# Altium PCB 388D_Control_v1_PCB1.PcbDoc (part 3 of 7)
Units mil, origin at the board's own origin, x right, y up, seen from the top; angles counter-clockwise.
Board outline 3431 x 3800 mil, 6 copper layers (Top Layer, Singal Layer 2, Signal layer 3, Signal Layer 4, Signal Layer 5, Bottom Layer), stack 32.7 mil thick; 270 components, 383 nets, 1462 pads, 899 vias.
Unrouted connection lines stored in the file: 2.
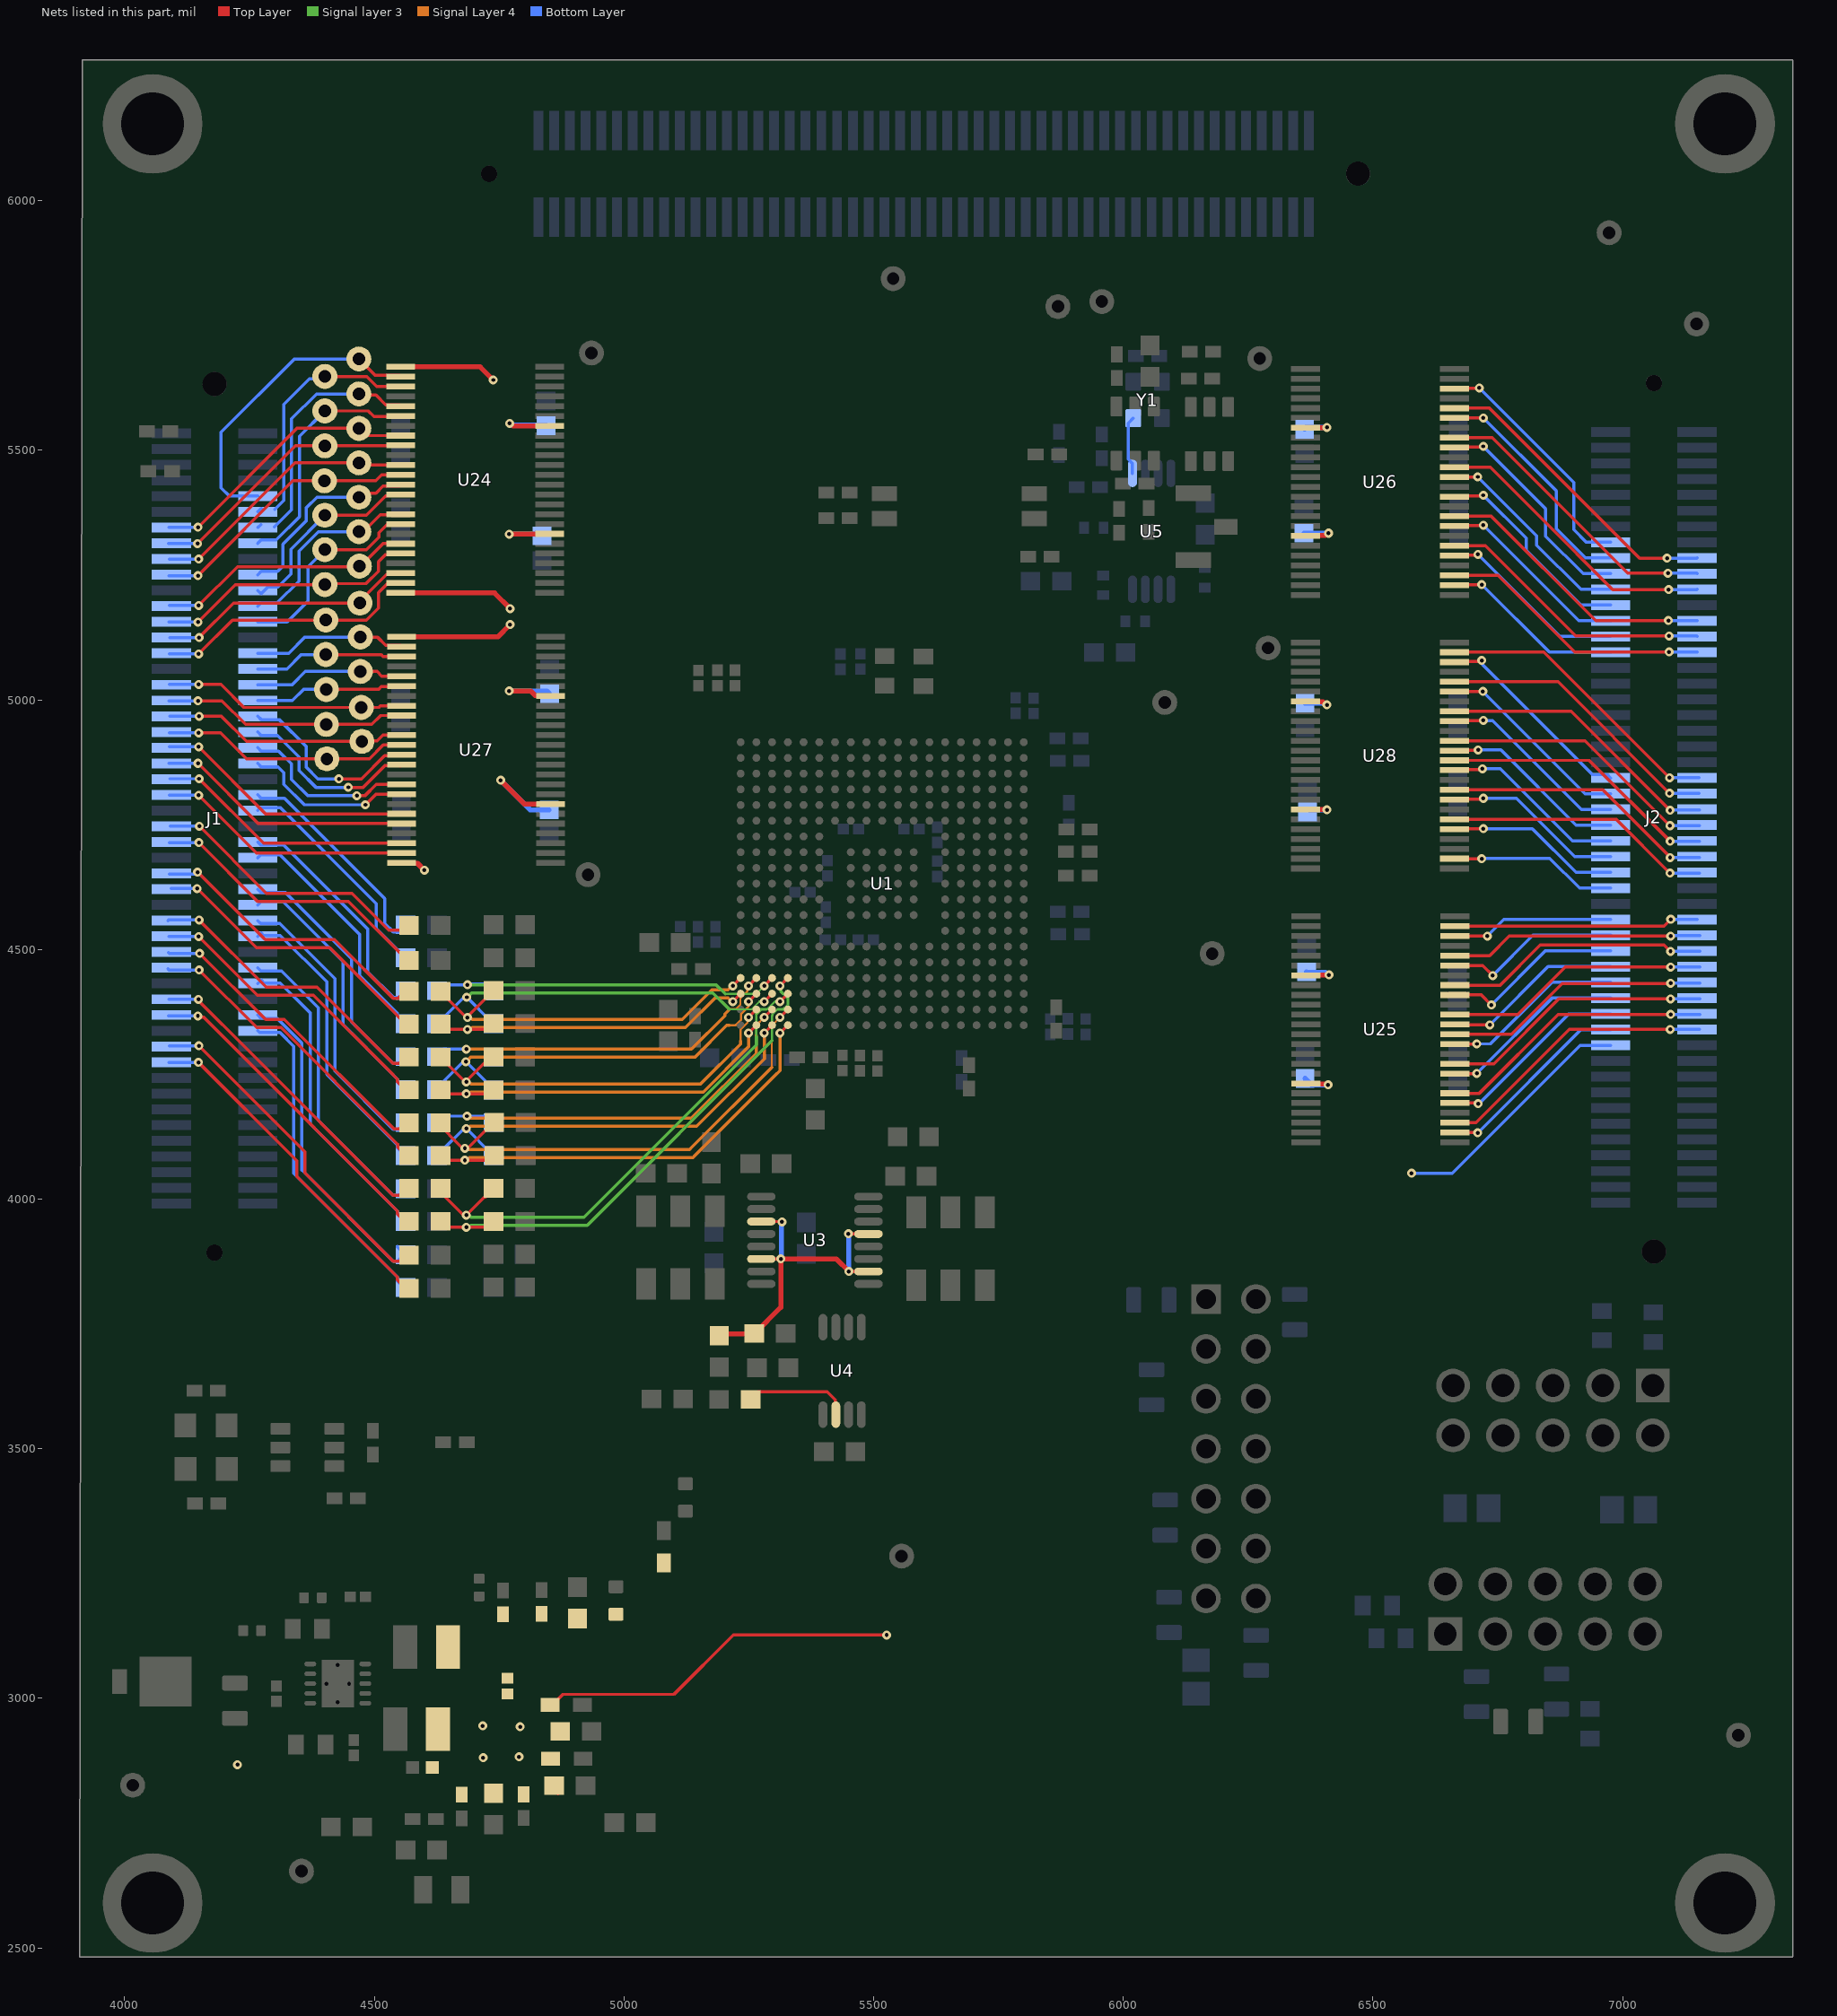
[diagram p6: the nets of this part, all layers, seen from the top]

## Part data (continued)
L3 L4 L5: library part CMP-006-00004-3, "Chip Ferrite Bead for General Use, 120 Ohm, 500 mA, -55 to 125 degC, 0603 (1608 Metric), RoHS, Tape and Reel", Case/Package=0603, Current Rating=500mA, Manufacturer=Murata, Max Operating Temperature=125°C, Min Operating Temperature=-55°C, Package Quantity=4000, Package Reference=BLM18_H950-2, Resistance=200mohm, Tolerance=25%, Core Material=Ferrite, Datasheet URL=https://statics3.seeedstudio.com/images/opl/datasheet/303010016.pdf, Datasheet Version=Jun-12, Impedance=120Ohm, Max Current Rating=500mA, Packaging=TapeandReel, RoHS Compliant=True
LED1: library part CMP-007-00038-1, "WL-SMCW SMT Mono-Color Chip LED Waterclear 0805", Manufacturer_Name="Wurth Elektronik", Manufacturer_Part_Number=150080VS75000, Mouser Part Number=710-150080VS75000, Datasheet Link=https://www.we-online.com/components/products/download/Download_3D_150080VS75000+%28rev1%29.pdf, Design Item ID=150080VS75000, Height=0.7mm, Mouser Price/Stock=https://www.mouser.co.uk/ProductDetail/Wurth-Elektronik/150080VS75000?qs=LlUlMxKIyB0tGHJmO6%252B0ug%3D%3D, Source=SamacSys.SchLib
R3 R4 R5 R6 R7 R8 R59: library part CMP-0026916-3, "RES, 39, 5%, 0.063 W, AEC-Q200 Grade 0, 0402", Manufacturer=Vishay-Dale, Power_W=63mW, Supplier Part Number 1=541-39JCT-ND, TempCo="200 ppm/C", Tolerance_%=5%, Value2=0.063W, Value_Code=39R0, ValueDisplayed=39, AEC Category=Q200, AEC Grade=0, AEC Qualified=Y, ComponentLink1Description="Datasheet link", ComponentLink1URL=http://www.vishay.com/docs/20035/dcrcwe3.pdf, CompType=Resistor, EIA_Code=E24, MountType=SMT, PackageReference=0402, PartNumber=CRCW040239R0JNED, Res_ohm=39, RoHS=E, SizeArea_mm2=0.5, SizeX_mm=1, SizeY_mm=0.5, SizeZ_mm=0.6, Supplier 1=Digi-Key, Supplier 2=Newark, Supplier 3=Mouser, Supplier Part Number 2=89M6649, Supplier Part Number 3=71-CRCW0402J-39-E3, Technology="Thick Film", Value1=5%, VDC_V=50V
R9 R10 R11 R12 R13 R14 R15 R16 R17 R18 R19 R20 R21 R22 R23 R24 R25 R26 R27 R28 R29 R30 R31 R32 R33 R34 R35 R36 R41 R42 R72 R73 R76 R85: library part CMP-0025697-4, "RES, 0, 5%, 0.1 W, AEC-Q200 Grade 0, 0603", Manufacturer=Vishay-Dale, Power_W=100mW, Supplier Part Number 1=541-0.0GCT-ND, TempCo="200 ppm/C", Tolerance_%=5%, Value2=0.1W, Value_Code=0000, ValueDisplayed=0, AEC Category=Q200, AEC Grade=0, AEC Qualified=Y, ComponentLink1Description="Datasheet link", ComponentLink1URL=http://www.vishay.com/docs/20035/dcrcwe3.pdf, CompType=Resistor, EIA_Code=E24, MountType=SMT, PackageReference=0603, PartNumber=CRCW06030000Z0EA, Res_ohm=0, RoHS=E, SizeArea_mm2=1.28, SizeX_mm=1.6, SizeY_mm=0.8, SizeZ_mm=1, Supplier 1=Digi-Key, Supplier 2=Newark, Supplier 3=Mouser, Supplier Part Number 2=52K8014, Supplier Part Number 3=71-CRCW0603-0-E3, Technology="Thick Film", Value1=5%, VDC_V=75V
R37 R38 R39 R40: library part CMP-0078660-1, "RES, 0.1, 1%, 0.25 W, 0402", Manufacturer=Panasonic, Power_W=250mW, Supplier Part Number 1=P17368CT-ND, TempCo="300 ppm/C", Tolerance_%=1%, Value2=0.25W, Value_Code=R100, ValueDisplayed=0.1, AEC Category=Q200, AEC Grade=N/A, AEC Qualified=N, ComponentLink1Description="Datasheet link", ComponentLink1URL=https://industrial.panasonic.com/cdbs/www-data/pdf/RDN0000/AOA0000C313.pdf, CompType=Resistor, EIA_Code=E96, MountType=SMT, PackageReference=0402, PartNumber=ERJ2BWFR100X, Res_ohm=1d, RoHS=Y, SizeArea_mm2=0.5, SizeX_mm=1, SizeY_mm=0.5, SizeZ_mm=0.6, Supplier 1=Digi-Key, Supplier 2=Mouser, Supplier Part Number 2=667-ERJ-2BWFR100X, Technology="Thick Film", Value1=1%
R43: library part CMP-0022895-5, "RES, 1.00 k, 1%, 0.1 W, 0603", Manufacturer=Yageo, Power_W=100mW, Supplier Part Number 1=311-1.00KHRCT-ND, TempCo="100 ppm/C", Tolerance_%=1%, Value2=0.1W, Value_Code=1k00, ValueDisplayed=1.00k, AEC Category=Q200, AEC Grade=N/A, AEC Qualified=N, ComponentLink1Description="Datasheet link", ComponentLink1URL=http://www.yageo.com/pdf/Pu-RC0603_51_PbFree_L_2.pdf, CompType=Resistor, EIA_Code=E96, MountType=SMT, PackageReference=0603, PartNumber=RC0603FR-071KL, Res_ohm=1k, RoHS=Y, SizeArea_mm2=1.28, SizeAreaWB_mm2=4.68, SizeX_mm=1.6, SizeY_mm=0.8, SizeZ_mm=1, Supplier 1=Digi-Key, Supplier 2=Mouser, Supplier 3=Farnell, Supplier Part Number 2=603-RC0603FR-071KL, Supplier Part Number 3=9238484, Technology="Thick Film", Value1=1%, VDC_V=75V
R44: library part CMP-009-00005-5, "Chip Resistor, 0 Ohm, 0.1 W, -55 to 155 degC, 0402 (1005 Metric)", Case/Package=0402, Max Operating Temperature=155°C, Min Operating Temperature=-55°C, Power=100mW, Tolerance=5%, Voltage Rating=50V, Mounting Technology=SM, Pins=2, RoHS Compliant=True
R45: library part CMP-009-00081-2, "22K 0.063W 1% 0402 (1005 Metric)  SMD", Case/Package=0402, Power=63mW, Tolerance=1%, Mounting Technology=SMT, Pins=2
R46 R163 R164 R165 R166 R167 R168 R169: library part CMP-009-00006-5, "Chip Resistor, 0 Ohm, 0.1 W, -55 to 155 degC, 0603 (1608 Metric)", Case/Package=0603, Max Operating Temperature=155°C, Min Operating Temperature=-55°C, Power=100mW, Tolerance=5%, Voltage Rating=50V, Mounting Technology=SM, Pins=2, RoHS Compliant=True
R47: library part CMP-0026962-3, "RES, 680, 5%, 0.063 W, AEC-Q200 Grade 0, 0402", Manufacturer=Vishay-Dale, Power_W=63mW, Supplier Part Number 1=541-680JCT-ND, TempCo="200 ppm/C", Tolerance_%=5%, Value2=0.063W, Value_Code=680R, ValueDisplayed=680/R0402, AEC Category=Q200, AEC Grade=0, AEC Qualified=Y, ComponentLink1Description="Datasheet link", ComponentLink1URL=http://www.vishay.com/docs/20035/dcrcwe3.pdf, CompType=Resistor, EIA_Code=E24, MountType=SMT, PackageReference=0402, PartNumber=CRCW0402680RJNED, Res_ohm=680, RoHS=E, SizeArea_mm2=0.5, SizeX_mm=1, SizeY_mm=0.5, SizeZ_mm=0.6, Supplier 1=Digi-Key, Supplier 2=Newark, Supplier 3=Mouser, Supplier Part Number 2=59M6744, Supplier Part Number 3=71-CRCW0402J-680-E3, Technology="Thick Film", Value1=5%, VDC_V=50V
R48: library part CMP-0026300-2, "RES, 340 k, 1%, 0.063 W, AEC-Q200 Grade 0, 0402", Manufacturer=Vishay-Dale, Power_W=63mW, Supplier Part Number 1=541-340KLCT-ND, TempCo="100 ppm/C", Tolerance_%=1%, Value2=0.063W, Value_Code=340k, ValueDisplayed=340k/R0402, AEC Category=Q200, AEC Grade=0, AEC Qualified=Y, ComponentLink1Description="Datasheet link", ComponentLink1URL=http://www.vishay.com/docs/20035/dcrcwe3.pdf, CompType=Resistor, EIA_Code=E96, MountType=SMT, PackageReference=0402, PartNumber=CRCW0402340KFKED, Res_ohm=340k, RoHS=E, SizeArea_mm2=0.5, SizeX_mm=1, SizeY_mm=0.5, SizeZ_mm=0.6, Supplier 1=Digi-Key, Supplier 2=Newark, Supplier 3=Mouser, Supplier Part Number 2=52K6992, Supplier Part Number 3=71-CRCW0402-340K-E3, Technology="Thick Film", Value1=1%, VDC_V=50V
R49: library part CMP-0026676-1, "RES, 2.00 k, 1%, 0.1 W, AEC-Q200 Grade 0, 0402", Manufacturer=Panasonic, Power_W=100mW, Supplier Part Number 1=P2.00KLCT-ND, TempCo="100 ppm/C", Tolerance_%=1%, Value2=0.1W, Value_Code=2k00, ValueDisplayed=2.00k/R0402, AEC Category=Q200, AEC Grade=0, AEC Qualified=Y, ComponentLink1Description="Datasheet link", ComponentLink1URL=http://industrial.panasonic.com/cdbs/www-data/pdf/RDA0000/AOA0000C86.pdf, CompType=Resistor, EIA_Code=E96, LatestRevisionDate=2017-03-09, MountType=SMT, PackageReference=0402, PartNumber=ERJ-2RKF2001X, Published=2008-06-26, Publisher="Texas Instruments", Res_ohm=2k, RoHS=Y, SizeArea_mm2=0.5, SizeX_mm=1, SizeY_mm=0.5, SizeZ_mm=0.6, Supplier 1=Digi-Key, Supplier 2=Newark, Supplier 3=Mouser, Supplier Part Number 2=73T6486, Supplier Part Number 3=667-ERJ-2RKF2001X, Technology="Thick Film", U/M=EA, Value1=1%, VDC_V=50V
R50: library part CMP-0026160-2, "RES, 205 k, 1%, 0.063 W, AEC-Q200 Grade 0, 0402", Manufacturer=Vishay-Dale, Power_W=63mW, Supplier Part Number 1=541-205KLCT-ND, TempCo="100 ppm/C", Tolerance_%=1%, Value2=0.063W, Value_Code=205k, ValueDisplayed=205k/R0402, AEC Category=Q200, AEC Grade=0, AEC Qualified=Y, ComponentLink1Description="Datasheet link", ComponentLink1URL=http://www.vishay.com/docs/20035/dcrcwe3.pdf, CompType=Resistor, EIA_Code=E96, MountType=SMT, PackageReference=0402, PartNumber=CRCW0402205KFKED, Res_ohm=205k, RoHS=E, SizeArea_mm2=0.5, SizeX_mm=1, SizeY_mm=0.5, SizeZ_mm=0.6, Supplier 1=Digi-Key, Supplier 2=Newark, Supplier 3=Mouser, Supplier Part Number 2=52K6827, Supplier Part Number 3=71-CRCW0402-205K-E3, Technology="Thick Film", Value1=1%, VDC_V=50V
R51: library part CMP-009-00066-2, "10K 0.063W 1% 0402 (1005 Metric)  SMD", Case/Package=0402, Power=63mW, Tolerance=1%, Mounting Technology=SMT, Pins=2
R52: library part CMP-009-00023-5, "Chip Resistor, 100 KOhm, +/- 1%, 0.1 W, -55 to 155 degC, 0603 (1608 Metric)", Case/Package=0603, Max Operating Temperature=155°C, Min Operating Temperature=-55°C, Power=100mW, Tolerance=1%, Voltage Rating=50V, Mounting Technology=SM, Pins=2, RoHS Compliant=True
R53: library part CMP-009-00163-3, "Chip Resistor, 200 kOhms, +/-1 %, 63 mW, -55 to 155 degC, 0402", Case/Package=0402, Max Operating Temperature=155°C, Min Operating Temperature=-55°C, Power=63mW, Tolerance=1%, Pins=2
R54: library part CMP-0025557-3, "RES, 75.0 k, 0.5%, 0.1 W, 0603", Manufacturer="Yageo America", Power_W=100mW, TempCo="50 ppm/C", Tolerance_%=0.5%, Value2=0.1W, Value_Code=75k0, ValueDisplayed=75.0k/R0603, AEC Category=Q200, AEC Qualified=?, ComponentLink1Description="Datasheet link", ComponentLink1URL=http://www.yageo.com/pdf/PYu-RT_1-to-0.05_RoHS_L_3.pdf, CompType=Resistor, EIA_Code=E192, LatestRevisionDate=2017-03-09, MountType=SMT, PackageReference=0603, PartNumber=RT0603DRE0775KL, Published=2008-06-26, Publisher="Texas Instruments", Res_ohm=75k, RoHS=Y, SizeArea_mm2=1.28, SizeX_mm=1.6, SizeY_mm=0.8, SizeZ_mm=1, Technology="Thin Film", U/M=EA, Value1=0.5%, VDC_V=75V
R55: library part CMP-0026950-3, "RES, 56, 5%, 0.063 W, AEC-Q200 Grade 0, 0402", Manufacturer=Vishay-Dale, Power_W=63mW, Supplier Part Number 1=541-56JCT-ND, TempCo="200 ppm/C", Tolerance_%=5%, Value2=0.063W, Value_Code=56R0, ValueDisplayed=56, AEC Category=Q200, AEC Grade=0, AEC Qualified=Y, ComponentLink1Description="Datasheet link", ComponentLink1URL=http://www.vishay.com/docs/20035/dcrcwe3.pdf, CompType=Resistor, EIA_Code=E24, MountType=SMT, PackageReference=0402, PartNumber=CRCW040256R0JNED, Res_ohm=56, RoHS=E, SizeArea_mm2=0.5, SizeX_mm=1, SizeY_mm=0.5, SizeZ_mm=0.6, Supplier 1=Digi-Key, Supplier 2=Newark, Supplier 3=Mouser, Supplier Part Number 2=89M6681, Supplier Part Number 3=71-CRCW0402J-56-E3, Technology="Thick Film", Value1=5%, VDC_V=50V
R62 R63 R68 R71 R79 R80: library part CMP-0026890-5, "RES, 2.2 k, 5%, 0.063 W, AEC-Q200 Grade 0, 0402", Manufacturer=Vishay-Dale, Power_W=63mW, Supplier Part Number 1=541-2.2KJCT-ND, TempCo="200 ppm/C", Tolerance_%=5%, Value2=0.063W, Value_Code=2k20, ValueDisplayed=2.2k, AEC Category=Q200, AEC Grade=0, AEC Qualified=Y, ComponentLink1Description="Datasheet link", ComponentLink1URL=http://www.vishay.com/docs/20035/dcrcwe3.pdf, CompType=Resistor, EIA_Code=E24, MountType=SMT, PackageReference=0402, PartNumber=CRCW04022K20JNED, Res_ohm=2.2k, RoHS=E, SizeArea_mm2=0.5, SizeX_mm=1, SizeY_mm=0.5, SizeZ_mm=0.6, Supplier 1=Digi-Key, Supplier 2=Newark, Supplier 3=Mouser, Supplier Part Number 2=59M6710, Supplier Part Number 3=71-CRCW0402J-2.2K-E3, Technology="Thick Film", Value1=5%, VDC_V=50V
R64: library part CMP-0078669-1, "RES, 10.0 k, 1%, 0.063 W, 0402", Manufacturer="Yageo America", Power_W=63mW, Supplier Part Number 1=311-10.0KLRCT-ND, TempCo="100 ppm/C", Tolerance_%=1%, Value2=0.063W, Value_Code=10k0, ValueDisplayed=10.0k, AEC Category=Q200, AEC Grade=N/A, AEC Qualified=N, ComponentLink1Description="Datasheet link", ComponentLink1URL=http://www.yageo.com/documents/recent/PYu-RC_Group_51_RoHS_L_8.pdf, CompType=Resistor, EIA_Code=E96, Green_EU RoHS="Passed with Exemption", Green_EU RoHS-2=Passed, Green_Lifecycle=Active, Green_REACh=Passed, MountType=SMT, PackageReference=0402, PartNumber=RC0402FR-0710KL, Res_ohm=10k, RoHS=Y, SizeArea_mm2=0.5, SizeX_mm=1, SizeY_mm=0.5, SizeZ_mm=0.6, Supplier 1=Digi-Key, Supplier 2=Newark, Supplier 3=Mouser, Supplier Part Number 2=98K7499, Supplier Part Number 3=603-RC0402FR-0710KL, Technology="Thick Film", Value1=1%
R66 R67: library part CMP-0026962-3, "RES, 680, 5%, 0.063 W, AEC-Q200 Grade 0, 0402", Manufacturer=Vishay-Dale, Power_W=63mW, Supplier Part Number 1=541-680JCT-ND, TempCo="200 ppm/C", Tolerance_%=5%, Value2=0.063W, Value_Code=680R, ValueDisplayed=680, AEC Category=Q200, AEC Grade=0, AEC Qualified=Y, ComponentLink1Description="Datasheet link", ComponentLink1URL=http://www.vishay.com/docs/20035/dcrcwe3.pdf, CompType=Resistor, EIA_Code=E24, MountType=SMT, PackageReference=0402, PartNumber=CRCW0402680RJNED, Res_ohm=680, RoHS=E, SizeArea_mm2=0.5, SizeX_mm=1, SizeY_mm=0.5, SizeZ_mm=0.6, Supplier 1=Digi-Key, Supplier 2=Newark, Supplier 3=Mouser, Supplier Part Number 2=59M6744, Supplier Part Number 3=71-CRCW0402J-680-E3, Technology="Thick Film", Value1=5%, VDC_V=50V
R69 R70: library part CMP-0026863-2, "RES, 1.5 M, 5%, 0.063 W, AEC-Q200 Grade 0, 0402", Manufacturer=Vishay-Dale, Power_W=63mW, Supplier Part Number 1=541-1.5MJCT-ND, TempCo="200 ppm/C", Tolerance_%=5%, Value2=0.063W, Value_Code=1M50, ValueDisplayed=1.5M, AEC Category=Q200, AEC Grade=0, AEC Qualified=Y, ComponentLink1Description="Datasheet link", ComponentLink1URL=http://www.vishay.com/docs/20035/dcrcwe3.pdf, CompType=Resistor, EIA_Code=E24, MountType=SMT, PackageReference=0402, PartNumber=CRCW04021M50JNED, Res_ohm=1.5M, RoHS=E, SizeArea_mm2=0.5, SizeX_mm=1, SizeY_mm=0.5, SizeZ_mm=0.6, Supplier 1=Digi-Key, Supplier 2=Mouser, Supplier Part Number 2=71-CRCW04021M50JNED, Technology="Thick Film", Value1=5%, VDC_V=50V
R74 R75: library part CMP-0026949-3, "RES, 56 k, 5%, 0.063 W, AEC-Q200 Grade 0, 0402", Manufacturer=Vishay-Dale, Power_W=63mW, Supplier Part Number 1=541-56KJCT-ND, TempCo="200 ppm/C", Tolerance_%=5%, Value2=0.063W, Value_Code=56k0, ValueDisplayed=56k, AEC Category=Q200, AEC Grade=0, AEC Qualified=Y, ComponentLink1Description="Datasheet link", ComponentLink1URL=http://www.vishay.com/docs/20035/dcrcwe3.pdf, CompType=Resistor, EIA_Code=E24, MountType=SMT, PackageReference=0402, PartNumber=CRCW040256K0JNED, Res_ohm=56k, RoHS=E, SizeArea_mm2=0.5, SizeX_mm=1, SizeY_mm=0.5, SizeZ_mm=0.6, Supplier 1=Digi-Key, Supplier 2=Newark, Supplier 3=Mouser, Supplier Part Number 2=89M6680, Supplier Part Number 3=71-CRCW0402J-56K-E3, Technology="Thick Film", Value1=5%, VDC_V=50V
R77 R78 R81 R83: library part CMP-0026765-1, "RES, 10.0, 0.1%, 0.063 W, 0402", Manufacturer="TE Connectivity", Power_W=63mW, Supplier Part Number 1=A102583CT-ND, TempCo="25 ppm/C", Tolerance_%=0.1%, Value2=0.063W, Value_Code=10R0, ValueDisplayed=10.0, AEC Category=Q200, AEC Grade=N/A, AEC Qualified=N, ComponentLink1Description="Datasheet link", ComponentLink1URL=http://www.te.com/commerce/DocumentDelivery/DDEController?Action=srchrtrv&DocNm=1773200&DocType=DS&DocLang=English, CompType=Resistor, EIA_Code=E192, LatestRevisionDate=2017-03-09, MountType=SMT, PackageReference=0402, PartNumber=CPF0402B10RE1, Published=2008-06-26, Publisher="Texas Instruments", Res_ohm=10, RoHS=Y, SizeArea_mm2=0.5, SizeX_mm=1, SizeY_mm=0.5, SizeZ_mm=0.35, Supplier 1=Digi-Key, Supplier 2=Newark, Supplier 3=Mouser, Supplier Part Number 2=80P3855, Supplier Part Number 3=279-CPF0402B10RE1, Technology="Thin Film", U/M=EA, Value1=0.1%
R82 R84 R86: library part CMP-0081856-1, "RES, 0, 0%, 0.2 W, AEC-Q200 Grade 0, 0402", Manufacturer=Vishay-Dale, Power_W=200mW, Supplier Part Number 1=541-0.0YBTR-ND, Tolerance_%=0%, Value2=0.2W, Value_Code=0, AEC Category=Q200, AEC Grade=0, AEC Qualified=Y, ComponentLink1Description="Datasheet link", ComponentLink1URL=http://www.vishay.com/docs/20043/crcwhpe3.pdf, CompType=Resistor, MountType=SMT, PackageReference=0402, PartNumber=CRCW04020000Z0EDHP, Res_ohm=0, RoHS=Y, SizeArea_mm2=0.5, SizeAreaWB_mm2=3, SizeX_mm=1, SizeY_mm=0.5, SizeZ_mm=0.6, Supplier 1=Digi-Key, Supplier 2=Newark, Supplier 3=Mouser, Supplier Part Number 2=96Y9050, Supplier Part Number 3=71-CRCW04020000Z0EDH, Technology="Thick Film", Value1=0%, ValueDisplayed=0, VDC_V=50V
R158: library part CMP-009-00174-4, "Chip Resistor, 4,7 Ohms, +/-5 %, 125 mW, -55 to 155 degC, 0805", Case/Package=0805, Max Operating Temperature=155°C, Min Operating Temperature=-55°C, Power=125mW, Tolerance=5%, Pins=2
R159 R162 R170 R171 R172 R173 R174: library part CMP-009-00174-4, "Chip Resistor, 4,7k Ohms, +/-5 %, 125 mW, -55 to 155 degC, 0805", Case/Package=0805, Max Operating Temperature=155°C, Min Operating Temperature=-55°C, Power=125mW, Tolerance=5%, Pins=2
R175: library part CMP-009-00174-4, "Chip Resistor, 4.7k Ohms, +/-5 %, 125 mW, -55 to 155 degC, 0805", Case/Package=0805, Max Operating Temperature=155°C, Min Operating Temperature=-55°C, Power=125mW, Tolerance=5%, Pins=2
R176 R177: library part CMP-0026938-5, "RES, 4.7 k, 5%, 0.063 W, AEC-Q200 Grade 0, 0402", Manufacturer=Vishay-Dale, Power_W=63mW, Supplier Part Number 1=541-4.7KJCT-ND, TempCo="200 ppm/C", Tolerance_%=5%, Value2=0.063W, Value_Code=4k70, ValueDisplayed=4.7k, AEC Category=Q200, AEC Grade=0, AEC Qualified=Y, ComponentLink1Description="Datasheet link", ComponentLink1URL=http://www.vishay.com/docs/20035/dcrcwe3.pdf, CompType=Resistor, EIA_Code=E24, MountType=SMT, PackageReference=0402, PartNumber=CRCW04024K70JNED, Res_ohm=4.7k, RoHS=E, SizeArea_mm2=0.5, SizeX_mm=1, SizeY_mm=0.5, SizeZ_mm=0.6, Supplier 1=Digi-Key, Supplier 2=Newark, Supplier 3=Mouser, Supplier Part Number 2=59M6733, Supplier Part Number 3=71-CRCW0402J-4.7K-E3, Technology="Thick Film", Value1=5%, VDC_V=50V
S1 S2: library part CMP-0002233-1, "Switch, Dual SPDT,  2 Pos, 0.1A, 6VDC, SMD", CurrentRating_mA=100A, Manufacturer="Copal Electronics", Supplier Part Number 1=CASD20JCT-ND, Circuit=SPDT, ComponentLink1Description="Datasheet Link", ComponentLink1URL=http://www.nidec-copal-electronics.com/e/catalog/switch/cas.pdf, CompType=Switch, LatestRevisionDate=2017-03-09, MountType=SMT, Orientation="Top Actuated", PackageReference=5.4x3.9mm, PartNumber=CAS-D20TA, PositionCount=2, Publisher="Texas Instruments", RoHS=Y, Supplier 1=Digi-Key, SwitchFunction=On-On, VDC_V=6V
S3: library part CMP-0002193-2, "Switch, SPST-NO, Off-Mom, 12 V, SMD", CurrentRating_mA=50A, Manufacturer="Omron Electronic Components", Supplier Part Number 1=SW1021CT-ND, Circuit=SPST-NO, ComponentLink1Description="Datasheet URL", ComponentLink1URL=http://www.omron.com/ecb/products/pdf/en-b3u.pdf, CompType=Switch, LatestRevisionDate=2017-03-09, MountType=SMT, Orientation="Top Actuated", PackageReference="SMD, 3-Leads, Body 3x2.5mm", PartNumber=B3U-1100P, PositionCount=1, Publisher="Texas Instruments", RoHS=Y, Supplier 1=Digi-Key, Supplier 2=Newark, Supplier 3=Mouser, Supplier Part Number 2=39M4619, Supplier Part Number 3=653-B3U-1100P, SwitchFunction=Off-Mom, VDC_V=12V
S4: library part CMP-0002230-1, "Switch, SPST, 2 Pos, 25mA, 24VDC, SMD", CurrentRating_mA=25A, Manufacturer="CTS Electrocomponents", Supplier Part Number 1=CT2182LPST-ND, Circuit=SPST, ComponentLink1Description="Datasheet Link", ComponentLink1URL=http://www.ctscorp.com/components/Datasheets/218.pdf, CompType=Switch, LatestRevisionDate=2017-03-09, MountType=SMT, Orientation="Top Actuated", PackageReference=3.71x5.8mm, PartNumber=218-2LPST, PositionCount=2, Publisher="Texas Instruments", RoHS=Y, Supplier 1=Digi-Key, Supplier 2=Mouser, Supplier Part Number 2=774-2182LPST, SwitchFunction=Off-On, VDC_V=24V
TP1 TP2 TP3 TP4 TP5 TP6 TP7 TP8 TP9 TP10 TP15 TP16 TP17 TP18 TP19 TP20 TP21 TP22 TP23 TP24 TP25 TP26 TP27 TP28 TP29 TP30 TP31 TP32 TP33 TP34 TP35 TP36 TP37 TP38 TP39 TP40 TP41 TP42 TP43: library part CMP-0078143-3, "TEST POINT.  No entry in BOM.", Manufacturer=N/A, CompType=Testpoint, PackageReference=N/A, PartNumber=N/A
U1: library part CMP-012-000147-1, "TMS320F28388DZWTS, ZWT0337A (NFBGA-337)", Alternate Manufacturer="Texas Instruments", AEC Category=Q200, AEC Qualified=N, Available Preview Images=2D, ComponentLink1Description="Datasheet Link", ComponentLink1URL=http://www.ti.com/lit/ds/symlink/tms320f28388d.pdf, ComponentLink2Description="Product Folder", ComponentLink2URL=http://www.ti.com/product/tms320f28388d, ComponentLink3Description="Online Datasheet", ComponentLink3URL=http://www.ti.com/product/tms320f28388d/datasheet, CompType=IC, Design Item ID=TMS320F28388DZWTS, Manufacturer="Texas Instruments", MountType=SMT, PackageDescription=NFBGA-337, PackageReference=ZWT0337A, PartNumber=TMS320F28388DZWTS, SizeArea_mm2=256, SizeAreaWB_mm2=324, SizeX_mm=16, SizeY_mm=16, SizeZ_mm=1.4, Source=SamacSys.SchLib
U2: library part CMP-0051789-2, "Dual Buffer/Driver with Open-Drain Output, DBV0006A, LARGE T&R", F @ Nom Voltage(Max)(Mhz)=150, Generic Part Number=SN74LVC2G07, ICC @ Nom Voltage(Max)(mA)=0.01, Manufacturer="Texas Instruments", Operating Temperature Range(C)="-40 to 125", Rating=Catalog, tpd @ Nom Voltage(Max)(ns)=8.6,4.4,3.7,2.9, Voltage(Nom)(V)=1.8,2.5,3.3,5, 3-State Output=No, AEC Category=Q200, AEC Qualified=N, Bits(#)=2, ComponentLink1Description="Datasheet Link", ComponentLink1URL=http://www.ti.com/lit/ds/symlink/sn74lvc2g07.pdf, ComponentLink2Description="Product Folder", ComponentLink2URL=http://www.ti.com/product/sn74lvc2g07, ComponentLink3Description="Online Datasheet", ComponentLink3URL=http://www.ti.com/product/sn74lvc2g07/datasheet, CompType=IC, DatasheetVersion=SCES308K, Green_EU RoHS=Passed, Green_EU RoHS-2=Passed, Green_Lifecycle=Active, Green_REACh=Passed, Input Type=CMOS/TTL, Logic=True, MountType=SMT, Output Drive (IOL/IOH)(Max)(mA)=32/-32, Output Type=CMOS, PackageDescription=SOT-23-6, PackageReference=DBV0006A, PartNumber=SN74LVC2G07DBVR, RoHS=Y, Schmitt Trigger=No, SizeArea_mm2=8.12, SizeAreaWB_mm2=14.82, SizeX_mm=2.8, SizeY_mm=2.9, SizeZ_mm=1.45, Sub-Family="Inverting Buffer/Driver", Technology Family=LVC, VCC(Max)(V)=5.5, VCC(Min)(V)=1.65
U3: library part CMP-014-00004-2, "High-Speed, Single-Supply, Rail-to-Rail Operational Amplifier MicroAmplifier(TM) Series, 2.7 to 5.5 V, -55 to 150 degC, 16-pin SOP (DBQ16), Green (RoHS & no Sb/Br)", Case/Package="16-Pin, Plastic Small Outline, Body 3.9 x 4.9 mm, Pitch 0.635 mm", Manufacturer="Texas Instruments", Total Supply Voltage(Max)(+5V is 5, +/-5V is 10)=5.5, Total Supply Voltage(Min)(+5V is 5, +/-5V is 10)=2.7, Available Preview Images=2D, CMRR(Min)(dB)=66, Code_JEDEC=MO-137, ComponentLink1Description="Manufacturer URL", ComponentLink1URL=http://www.ti.com/, ComponentLink2Description=Datasheet, ComponentLink2URL=http://www.ti.com/general/docs/lit/getliterature.tsp?genericPartNumber=OPA4350&fileType=pdf, ComponentLink3Description="Package Specification", ComponentLink3URL=http://www.ti.com/litv/pdf/msoi004g, DatasheetVersion=SBOS099C, Design Item ID=CMP-0041147-1, Eco-Plan="Green (RoHS & no Sb/Br)", IIB(Max)(pA)=10, Iq per channel(Max)(mA)=7.5, Mounting Technology="Surface Mount", Number of Channels=4, Offset Drift(Typ)(uV/C)=4, PackageReference=DBQ0016A, PackageVersion="4073301-2/H, 10/2008", Slew Rate(Typ)(V/us)=22, Source=SamacSys.SchLib, Sub Family="Low Input Bias Current Amp (<=10pA), Low Offset Voltage Amplifier (<=500uV), Low Supply Voltage Amplifier (<=2.7V), Precision Amplifier", Vio (25C)(Max)(mV)=0.5, Vn at 1kHz(Typ)(nV/rtHz)=18
U4: library part CMP-0032596-2, "Low Noise, Very Low Drift, Precision Series Voltage Reference, DGK0008A (VSSOP-8)", Manufacturer="Texas Instruments", Rating=Catalog, Temp Coeff(Max)(ppm/ degree C)=3, AEC Category=Q200, AEC Qualified=N, Code_JEDEC=MO-187-AA, ComponentLink1Description="Datasheet Link", ComponentLink1URL=http://www.ti.com/lit/ds/symlink/ref5030.pdf, ComponentLink2Description="Product Folder", ComponentLink2URL=http://www.ti.com/product/ref5030, ComponentLink3Description="Online Datasheet", ComponentLink3URL=http://www.ti.com/product/ref5030/datasheet, CompType=IC, DatasheetVersion=SBOS410E, Eco-Plan="Green (RoHS & no Sb/Br)", Initial Accuracy @ 25/deg C(%)=0.05, Iout/Iz(Max)(mA)=10, Iq(Max)(uA)=1000, MountType=SMT, PackageDescription=VSSOP-8, PackageReference=DGK0008A, PackageVersion=4073329/E, PartNumber=REF5030IDGKT, RoHS=Y, SizeArea_mm2=14.7, SizeAreaWB_mm2=23.6, SizeX_mm=4.9, SizeY_mm=3, SizeZ_mm=1.1, SubFamily="Series Voltage Reference", VI(Max)(V)=18, VI(Min)(V)=3.2, VO(V)=3
U5: library part CMP-052-000006-1, "Low Jitter, 1:4 LVCMOS Fan-out Clock Buffer, PW0008A (TSSOP-8)", Alternate Manufacturer="Texas Instruments", Available Preview Images=2D, ComponentLink1Description="Datasheet Link", ComponentLink1URL=http://www.ti.com/lit/ds/symlink/cdclvc1104.pdf, CompType=IC, Design Item ID=CDCLVC1104PW, Green_EU RoHS=Passed, Green_EU RoHS-2=Passed, Green_Lifecycle=Active, Green_REACh=Passed, LatestRevisionDate=2017-06-09, Manufacturer="Texas Instruments", MountType=SMT, PackageDescription=TSSOP-8, PackageReference=PW0008A, PartNumber=CDCLVC1104PW, Publisher="Texas Instruments", RoHS=Y, SizeArea_mm2=19.2, SizeAreaWB_mm2=42.0, SizeX_mm=6.4, SizeY_mm=3.0, SizeZ_mm=1.2, Source=MCU063B.SCHLIB, U/M=EA
U6 U7: library part CMP-052-000005-1, "High-Accuracy, Fixed-Threshold OV/UV Monitor, DDC0006A (SOT-23-T-6)", Alternate Manufacturer="Texas Instruments", Alternate PartNumber=TPS3702CX33DDCR, AEC Category=Q200, AEC Qualified=N, Available Preview Images=2D, ComponentLink1Description="Datasheet Link", ComponentLink1URL=http://www.ti.com/lit/ds/symlink/tps3702.pdf, ComponentLink2Description="Product Folder", ComponentLink2URL=http://www.ti.com/product/tps3702, ComponentLink3Description="Online Datasheet", ComponentLink3URL=http://www.ti.com/product/tps3702/datasheet, CompType=IC, Design Item ID=TPS3702CX33DDCT, Manufacturer="Texas Instruments", MountType=SMT, PackageDescription=SOT-23-T-6, PackageReference=DDC0006A, RoHS=Y, SizeArea_mm2=4.8675, SizeAreaWB_mm2=10.4675, SizeX_mm=1.65, SizeY_mm=2.95, SizeZ_mm=0.87, Source=MCU063B.SCHLIB
  U6: PartNumber=TPS3702CX33DDCT
  U7: PartNumber=TPS3702CX12DDCT
U8: library part CMP-014-000012-1, "Dual, Adjustable, 600mA and 1000mA, 2.25MHz Step-Down Converter with 1-Wire Interface in QFN 10-VSON -40 to 85", Alternate_PartNumber=TPS62420DRCT, Manufacturer="Texas Instruments", CompType=IC, Copyright="Copyright (C) 2025 Ultra Librarian. All rights reserved.", Design Item ID=TPS62420DRCR, Manufacturer_Name="Texas Instruments", Manufacturer_Part_Number=TPS62420DRCR, MountType=SMT, PackageReference=DRC0010J, PartNumber=TPS62420DRCR, RefDes=RefDes, RoHS=Y, Source=SamacSys.SchLib, Type=TYPE
U24 U25 U26 U27 U28: library part CMP-031-00095-1, "16-Bit Dual-Supply Bus Transceiver", Manufacturer_Name="Texas Instruments", Mouser Part Number=595-SN74LVCH16T245GR, Arrow Part Number=SN74LVCH16T245DGGR, Arrow Price/Stock=https://www.arrow.com/en/products/sn74lvch16t245dggr/texas-instruments, Datasheet Link=http://www.ti.com/lit/gpn/sn74lvch16t245, Design Item ID=SN74LVCH16T245DGGR, Height=1.2mm, Manufacturer_Part_Number=SN74LVCH16T245DGGR, Mouser Price/Stock=https://www.mouser.co.uk/ProductDetail/Texas-Instruments/SN74LVCH16T245DGGR?qs=dT9u2OTAaVU%2FCf3PTalIAw%3D%3D, Source=388D_Control_v1.SchLib
Y1: library part CMP-052-000000-1, "Oscillator, 25 MHz, 15 pF, SMD", Frequency Stability="10 ppm", Frequency_Fixed=25MHz, Load Capacitance=15pF, Manufacturer="ECS Inc.", PartNumber=ECS-2520S33-250-FN-TR, AEC Category=Q200, AEC Grade=N/A, AEC Qualified=N, Available Preview Images=2D, ComponentLink1Description="Datasheet Link", ComponentLink1URL=https://www.ecsxtal.com/store/pdf/ECS-2520S.pdf, CompType=Oscillator, Design Item ID=CMP-0082061-2, MountType=SMT, PackageReference=2x2.5mm, RoHS=Y, SizeArea_mm2=5, SizeAreaWB_mm2=10.5, SizeX_mm=2, SizeY_mm=2.5, SizeZ_mm=1, Source=MCU063B.SCHLIB, TaMax_C=85°C, TaMin_C=-40°C

## Free pads (board coordinates)
  round 200 hole 126 unplated: 2(4056,2590) 2(4056,6154) 2(7205,2590) 2(7205,6154)

## Via types
v1: diameter 18, hole 8, Top Layer to Bottom Layer, tented both sides, 898 vias
v2: diameter 18/18/18/18/18/18 (per signal layer), hole 8, Top Layer to Bottom Layer, tented both sides, 1 vias

## Nets (pads, with @x,y where several pads share a name; then routed paths per layer and width w, separated by ;. In a path a pad name is that pad's centre, name@x,y a point inside that pad or via, vN(x,y) a via of type N, cw(c..) or ccw(c..) an arc to the next point about the centre after c; other vN are vias at no path point)
1V2: C36.1 C37.1 C71.2 D2.2 L2.2 L5.1 R50.2
3V3: C35.1 C42.1 C53.1 C170.1 C171.1 C172.1 C173.1 C178.1 C179.1 C180.1 C181.1 C184.1 C185.1 D2.1 J2.21 L1.2 L3.1 L4.1 R44.2 R47.2 R48.2 U24.1 U24.24 U24.31 U24.42 U25.31 U25.42 U26.31 U26.42 U27.1 U27.24 U27.31 U27.42 U28.31 U28.42 | length 3235.1
  Top Layer w6.25: C53.1@4851,2825.5 4851.98,2825.5 4867.56,2809.92 C53.1@4867.56,2808.94 ; L3.1@4852.02,2987 4856.94,2987 4877.94,3008 5100,3008 5219,3127 v1(5526,3127)
  Top Layer w10: U24.24@4552.72,5214.59 4553.02,5214.3 4740.7,5214.3 v1(4771.9,5183.1) v1@4772,5183 ; U24.1@4552.9,5667.17 4711.83,5667.17 v1(4738,5641) ; U27.24@4554.71,4673.54 4555.62,4672.64 4586.47,4672.64 v1(4600.01,4659.1) ; U27.1@4554.71,5126.3 4747.3,5126.3 v1(4772,5151) ; v1(4753,4839) 4800.34,4791.66 U27.31@4852.98,4791.65 ; v1(4770,5018) 4813,5018 4821.9,5009.1 4852.08,5009.1 U27.42@4852.98,5008.19 ; v1(4770,5332) 4770.35,5332.35 4850.24,5332.35 U24.31@4850.59,5332.7 ; v1(4771,5554) 4773.16,5554 4777.93,5549.24 4848.91,5549.24 U24.42@4848.98,5549.17 ; U28.31@6364.42,4996.74 6365.02,4996.15 6399.69,4996.15 6405.84,4990 v1(6408,4990) ; U28.42@6364.87,4780.52 6365.13,4780.26 6407.74,4780.26 v1(6408,4780) ; U26.31@6364.87,5545.05 6365.24,5545.42 6407.64,5545.42 v1(6408.01,5545.78) ; U26.42@6365.46,5328.52 6366.37,5329.42 6404.16,5329.42 6408.84,5334.1 v1(6411.01,5334.1) ; U25.42@6365.74,4231.82 6366.65,4230.92 6405.92,4230.92 6407.84,4229 v1(6410,4229) ; U25.31@6366.11,4448.73 6411.64,4448.73 v1(6412.01,4449.1)
  Bottom Layer w6.25: v1(6577,4052) 6659,4052 6915.21,4308.21 J2.21@6976.01,4308.21
  Bottom Layer w10: v1(4753,4839) 4812.39,4779.61 C173.1@4850,4779.61 ; v1(4770,5018) 4845.5,5018 C172.1@4851.01,5012.5 ; v1(4770,5332) C170.1@4842.72,5332 ; v1(4771,5554) 4773.16,5554 4776.16,5551 4842.5,5551 C171.1@4844.01,5549.5 ; C179.1@6362.01,5334.18 6362.08,5334.1 v1(6411.01,5334.1) ; C178.1@6363.01,5542.39 6366.4,5545.78 v1(6408.01,5545.78) ; C185.1@6364.01,4241.78 6376.79,4229 v1(6410,4229) ; C180.1@6364.01,4993.39 6402.45,4993.39 6405.84,4990 v1(6408,4990) ; C184.1@6367.01,4455.18 6368.08,4454.1 6404.84,4454.1 6409.84,4449.1 v1(6412.01,4449.1) ; C181.1@6373.19,4780 v1(6408,4780)
  other v1: 4226,2867 4718,2881 4790,2883 4792,2943 4717,2945
25MHZ_CLK: U5.1 Y1.3 | length 118.3
  Bottom Layer w6.25: U5.1@6018.46,5453.94 6018.46,5473.57 6010,5482.03 6010,5554.41 Y1.3@6020.12,5564.53
1415_N: C4.1 R18.1 U1.U4 | length 1023.9
  Top Layer w6: R18.1@4625.09,4020.68 4626.07,4020.68 4676.6,3970.15 4682.02,3970.15 v1(4684.32,3967.86) 4720.66,4004.21 4722.65,4004.21 C4.1@4738.35,4019.91
  Top Layer w6.25: v1(5312.45,4395.77) U1.U4@5328.2,4411.52
  Signal layer 3 w4: 5284.09,4380.1 5284.76,4380.77 5287.17,4380.77 5302.17,4395.77 v1(5312.45,4395.77)
  Signal layer 3 w4.74: 5264.83,4325.34 5264.83,4370.95
  Signal layer 3 w5.33: 5264.83,4370.95 5273.82,4379.94 5283.93,4379.94 5284.09,4380.1
  Signal layer 3 w6.25: v1(4684.32,3967.86) 4686.56,3965.61 4692.22,3965.61 4693.85,3963.98 4919.91,3963.98 5264.83,4308.91 5264.83,4325.34
1415_P: C16.1 R17.1 U1.T4 | length 1054
  Top Layer w6.25: R17.1@4625.18,3958.32 4639.65,3943.86 v1(4684.32,3943.86) 4726.02,3943.86 C16.1@4740.84,3958.67 ; v1(5312.45,4427.27) U1.T4@5328.2,4443.01
  Signal layer 3 w4: 5296.7,4366.93 5297.45,4367.67 5297.45,4370.49 5306.99,4380.02 5307.81,4380.02
  Signal layer 3 w4.49: 5296.7,4317.8 5296.7,4366.93
  Signal layer 3 w5.5: 5307.81,4380.02 5318.98,4380.02 5328.2,4389.25 5328.2,4402.83
  Signal layer 3 w6.25: v1(4684.32,3943.86) 4686.56,3946.11 4692.22,3946.11 4693.85,3947.73 4926.64,3947.73 5296.7,4317.8 ; v1(5312.45,4427.27) 5314.35,4425.36 5314.35,4415.68 5318.14,4411.89 5319.13,4411.89 5328.2,4402.83
A0A1_N: C1.1 R11.1 U1.T1 | length 745.4
  Top Layer w6: R11.1@4628.17,4420.41 4628.17,4419.86 4684.17,4363.86 v1(4686.32,4363.86) 4686.32,4365.54 4741.59,4420.81 C1.1@4741.86,4420.81
  Top Layer w6.25: v1(5217.97,4427.27) U1.T1@5233.71,4443.01
  Signal Layer 4 w6.25: v1(4686.32,4363.86) 4688.56,4361.61 4694.22,4361.61 4695.85,4359.98 5116.4,4359.98 5176.06,4419.64 5208.43,4419.64 5216.05,4427.27 v1(5217.97,4427.27)
A0A1_P: C13.1 R10.1 U1.U1 | length 711.2
  Top Layer w6.25: R10.1@4627.18,4354.32 4641.65,4339.86 v1(4686.32,4339.86) 4728.02,4339.86 C13.1@4742.84,4354.67 ; v1(5217.97,4395.77) U1.U1@5233.71,4411.52
  Signal Layer 4 w6.25: v1(4686.32,4339.86) 4688.56,4342.11 4694.22,4342.11 4695.85,4343.73 5123.13,4343.73 5182.79,4403.39 5208.43,4403.39 5216.05,4395.77 v1(5217.97,4395.77)
A2A3_N: C2.1 R13.1 U1.T2 | length 771.4
  Top Layer w6.25: v1(5249.46,4427.27) U1.T2@5265.21,4443.01
  Signal Layer 4 w4: 5210.99,4380.1 5211.66,4380.77 5224.18,4380.77 5232.97,4389.56 5232.97,4402.08 5247.2,4416.31 5247.2,4425 v1@5247.56,4425.36
  Signal Layer 4 w6.25: v1(4684.43,4300.32) 5135.05,4300.32 5201.84,4367.11 5201.84,4370.95 5210.99,4380.1 ; v1@5247.56,4425.36 v1(5249.46,4427.27)
  Bottom Layer w6: v1(4684.43,4300.32) 4718.15,4300.32 4718.33,4300.14 4722.87,4300.14 C2.1@4735.39,4287.62
  Bottom Layer w6.25: R13.1@4628.14,4289.94 4638.52,4300.32 v1(4684.43,4300.32)
A2A3_P: C14.1 R12.1 U1.U2 | length 809
  Top Layer w6.25: v1(5249.46,4395.77) U1.U2@5265.21,4411.52
  Signal Layer 4 w4: 5223.88,4348.98 5234.09,4359.18
  Signal Layer 4 w4.54: 5234.09,4359.18 5234.09,4370.5 5249.46,4385.87 v1(5249.46,4395.77)
  Signal Layer 4 w4.74: 5211.29,4348.15 5223.05,4348.15 5223.88,4348.98
  Signal Layer 4 w6.25: v1(4683.32,4275.47) 4684.25,4275.47 4692.85,4284.07 5141.78,4284.07 5205.98,4348.27 5211.16,4348.27 5211.29,4348.15
  Bottom Layer w6: R12.1@4625.06,4222.92 4675.31,4273.17 4681.02,4273.17 v1(4683.32,4275.47) 4733.11,4225.67 C14.1@4740.84,4225.67
A4A5_N: C3.1 R15.1 U1.T3 | length 729.9
  Top Layer w6.25: v1(5280.96,4427.27) U1.T3@5296.7,4443.01
  Signal layer 3 w4: 5202.82,4411.09 5264.78,4411.09 v1(5280.96,4427.27)
  Signal layer 3 w6.25: v1(4686.43,4429.32) 5184.59,4429.32 5202.82,4411.09
  Bottom Layer w6: v1(4686.43,4429.32) 4688.54,4431.43 4721.19,4431.43 C3.1@4723.04,4433.29
  Bottom Layer w6.25: R15.1@4630.14,4418.94 4640.52,4429.32 v1(4686.43,4429.32)
A4A5_P: C15.1 R14.1 U1.U3 | length 800.5
  Top Layer w6.25: v1(5280.96,4395.77) U1.U3@5296.7,4411.52
  Signal layer 3 w4: 5210.53,4380.4 5256.07,4380.4 5271.44,4395.77 v1(5280.96,4395.77)
  Signal layer 3 w6.25: v1(4685.32,4404.47) 4686.25,4404.47 4694.85,4413.07 5177.86,4413.07 5210.53,4380.4
  Bottom Layer w6: R14.1@4626.07,4351.92 4627.06,4351.92 4677.31,4402.17 4683.02,4402.17 v1(4685.32,4404.47) 4735.11,4354.67 C15.1@4742.84,4354.67
ADC_3V0_REF: R42.2 U4.6 | length 221.4
  Top Layer w6.25: R42.2@5253.45,3598.9 5268.55,3614 5406.96,3614 5422.88,3598.08 5422.88,3560.67 U4.6@5424.09,3559.46
ADC_A0A1_N: J1.58 R11.2 | length 585.4
  Top Layer w6.25: v1(4146.01,4655.1) 4281.42,4519.69 4420.42,4519.69 4537.52,4402.59 4548.09,4402.59 R11.2@4562.92,4417.42
  Bottom Layer w6.25: J1.58@4089.9,4651.1 4138.83,4651.1 4142.83,4655.1 v1(4146.01,4655.1)
ADC_A0A1_P: J1.60 R10.2 | length 583
  Top Layer w6.25: v1(4145.01,4622.1) 4263.67,4503.44 4410.76,4503.44 4546.36,4367.85 4546.36,4366.93 4562.22,4351.06 R10.2@4563.14,4351.06
  Bottom Layer w6.25: J1.60@4092.9,4622.1 v1(4145.01,4622.1)
ADC_A2A3_N: J1.59 R13.2 | length 520
  Bottom Layer w6.25: J1.59@4266.7,4620.93 4273.41,4614.21 4321.9,4614.21 4454.01,4482.1 4454.01,4355.78 4537.52,4272.27 4549.9,4272.27 R13.2@4562.92,4285.28
ADC_A2A3_P: J1.61 R12.2 | length 532.4
  Bottom Layer w6.25: J1.61@4266.7,4589.43 4273.37,4596.1 4317.01,4596.1 4437.01,4476.1 4437.01,4349.8 4530.79,4256.02 4546.36,4240.45 4546.36,4234.77 4561.91,4219.22 R12.2@4562.92,4219.19
ADC_A4A5_N: J1.53 R15.2 | length 480.9
  Bottom Layer w6.25: J1.53@4266.7,4715.41 4273.01,4709.1 4319.01,4709.1 4487.01,4541.1 4487.01,4454.93 4537.52,4404.42 4549.92,4404.42 R15.2@4562.92,4417.42
ADC_A4A5_P: J1.55 R14.2 | length 490.5
  Bottom Layer w6.25: J1.55@4266.7,4683.92 4272.88,4690.1 4273.65,4689.33 4311.78,4689.33 4470.76,4530.35 4470.76,4448.2 4546.36,4372.6 4546.36,4366.93 4561.93,4351.35 R14.2@4562.92,4351.35
ADC_B0B1_N: J1.66 R20.2 | length 604.5
  Top Layer w6.25: v1(4148.01,4526.1) 4265.63,4408.48 4378.33,4408.48 4529.81,4257 4546.36,4240.45 4546.36,4234.77 4561.93,4219.19 R20.2@4562.92,4219.19
  Bottom Layer w6.25: J1.66@4088.9,4526.1 v1(4148.01,4526.1)
ADC_B0B1_P: J1.64 R19.2 | length 600.6
  Top Layer w6.25: v1(4149.01,4559.1) 4283.38,4424.73 4385.06,4424.73 4537.52,4272.27 4549.91,4272.27 R19.2@4562.92,4285.28
  Bottom Layer w6.25: J1.64@4086.9,4558.1 4087.9,4559.1 v1(4149.01,4559.1)
ADC_B2B3_N: J1.65 R22.2 | length 590.6
  Bottom Layer w6.25: J1.65@4266.7,4526.44 4273.41,4533.15 4278.22,4528.35 4311.78,4528.35 4404.76,4435.37 4404.76,4249.93 4530.11,4124.58 4546.36,4108.33 4546.36,4102.66 R22.2@4558.98,4090.05
ADC_B2B3_P: J1.63 R21.2 | length 583.3
  Bottom Layer w6.25: J1.63@4266.7,4557.93 4272.44,4552.19 4310.92,4552.19 4421.01,4442.1 4421.01,4256.66 4537.52,4140.15 4549.92,4140.15 R21.2@4562.92,4153.15
ADC_B4B5_N: J1.70 R24.2 | length 634.9
  Top Layer w6.25: v1(4149.01,4459.1) 4264.63,4343.48 4313.21,4343.48 4531.13,4125.55 4543.72,4112.96 4547.38,4109.3 4547.38,4103.62 4562.96,4088.04 R24.2@4563.94,4088.04
  Bottom Layer w6.25: J1.70@4086.9,4461.1 4088.9,4459.1 v1(4149.01,4459.1)
ADC_B4B5_P: J1.68 R23.2 | length 627.6
  Top Layer w6.25: v1(4150.01,4492.1) 4282.38,4359.73 4319.94,4359.73 4538.54,4141.12 4550.93,4141.12 R23.2@4563.94,4154.13
  Bottom Layer w6.25: J1.68@4087.9,4494.1 4089.9,4492.1 v1(4150.01,4492.1)
ADC_C2C3_N: J1.52 R27.2 | length 562.1
  Top Layer w6.25: v1(4149.59,4747.1) 4283.96,4612.73 4455.05,4612.73 4529.18,4538.6 4550.51,4538.6 R27.2@4561.9,4549.98
  Bottom Layer w6.25: J1.52@4090.9,4747.1 v1(4149.59,4747.1)
ADC_C2C3_P: J1.54 R26.2 | length 567.3
  Top Layer w6.25: v1(4148.59,4714.1) 4266.21,4596.48 4448.32,4596.48 4560.91,4483.89 R26.2@4561.9,4483.89
  Bottom Layer w6.25: J1.54@4089.9,4714.1 v1(4148.59,4714.1)
ADC_C4C5_N: J1.47 R29.2 | length 444.9
  Bottom Layer w6.25: J1.47@4266.7,4809.9 4273.41,4803.18 4306.52,4803.18 4306.6,4803.1 4320.01,4803.1 4521.01,4602.1 4521.01,4552.1 4537.52,4535.59 4548.96,4535.59 R29.2@4562.92,4549.55
ADC_C4C5_P: J1.49 R28.2 | length 452.8
  Bottom Layer w6.25: J1.49@4266.7,4778.4 4272.39,4784.1 4312.01,4784.1 4504.01,4592.1 4504.01,4542.39 4546.36,4500.04 4546.36,4499.06 4561.93,4483.48 R28.2@4562.92,4483.48
ADC_D0D1_N: J1.71 R32.2 | length 632.9
  Bottom Layer w6.25: J1.71@4266.7,4431.95 4273.41,4438.67 4279.03,4433.05 4311.78,4433.05 4371.76,4373.08 4371.76,4150.8 4542.7,3979.86 4546.36,3976.2 4546.36,3970.53 4561.93,3954.96 R32.2@4562.92,3954.96
ADC_D0D1_P: J1.69 R31.2 | length 622.4
  Bottom Layer w6.25: J1.69@4266.7,4463.44 4273.04,4457.1 4314.01,4457.1 4388.01,4383.1 4388.01,4157.53 4537.52,4008.02 4549.92,4008.02 R31.2@4562.92,4021.02
ADC_D2D3_N: J1.77 R34.2 | length 659.9
  Bottom Layer w6.25: J1.77@4266.7,4337.46 4270.46,4333.7 4311.08,4333.7 4338.76,4306.02 4338.76,4051.66 4342.14,4048.27 4530.11,3860.31 4546.36,3844.06 4546.36,3836.41 R34.2@4559.97,3822.8
ADC_D2D3_P: J1.75 R33.2 | length 677.5
  Bottom Layer w6.25: J1.75@4266.7,4368.96 4273.41,4362.24 4305.52,4362.24 4355.01,4312.75 4355.01,4058.39 4358.39,4055 4537.52,3875.88 4546.36,3875.88 4559.97,3889.49 R33.2@4559.97,3890.86 ; R33.2@4546.36,3905.45 4546.36,3904.47 R33.2@4559.97,3890.86 ; R33.2@4562.92,3888.89 4560.95,3890.86 R33.2@4559.97,3890.86
ADC_D4D5_N: J1.82 R36.2 | length 682.6
  Top Layer w6.25: v1(4147.59,4274.1) 4344.76,4076.93 4344.76,4045.67 4529.81,3860.62 4546.36,3844.07 4546.36,3838.4 4561.93,3822.83 R36.2@4562.92,3822.83
  Bottom Layer w6.25: J1.82@4088.9,4274.1 v1(4147.59,4274.1)
ADC_D4D5_P: J1.80 R35.2 | length 681.8
  Top Layer w6.25: v1(4148.59,4307.1) 4361.01,4094.68 4361.01,4052.4 4537.52,3875.89 4549.92,3875.89 R35.2@4562.92,3888.89
  Bottom Layer w6.25: J1.80@4089.9,4307.1 v1(4148.59,4307.1)
ADC_IN1415_N: J1.74 R18.2 | length 643.1
  Top Layer w6.25: v1(4147.59,4400.1) 4147.59,4397.94 4246.59,4298.94 4537.52,4008.01 4549.91,4008.01 R18.2@4562.92,4021.02
  Bottom Layer w6.25: J1.74@4088.9,4400.1 v1(4147.59,4400.1)
ADC_IN1415_P: J1.76 R17.2 | length 649.1
  Top Layer w6.25: v1(4146.59,4367.1) 4148.84,4364.85 4157.69,4364.85 4230.34,4292.21 4530.79,3991.76 4542.7,3979.85 4546.36,3976.19 4546.36,3970.51 4561.93,3954.93 R17.2@4562.92,3954.93
  Bottom Layer w6.25: J1.76@4087.9,4367.1 v1(4146.59,4367.1)
ADC_REF: C33.1 R43.2 U3.2 U3.5 U3.11 U3.14 | length 703.3
  Top Layer w6.25: U3.14@5275.03,3880.15 v1(5314.31,3880.13) ; U3.11@5275.03,3955.15 5315.81,3955.15 v1(5316.31,3954.65) ; v1(5449.31,3930.65) 5449.81,3930.15 U3.5@5489.6,3930.15 ; v1(5450.31,3855.13) U3.2@5489.6,3855.15
  Top Layer w10: R43.2@5187.95,3730.39 5260.45,3730.39 C33.1@5260.95,3730.9 5261.94,3730.9 5314.31,3783.27 v1(5314.31,3880.13) 5425.31,3880.13 v1(5450.31,3855.13)
  Bottom Layer w10: v1(5314.31,3880.13) 5315.31,3881.13 5315.31,3953.65 v1(5316.31,3954.65) ; v1(5449.31,3930.65) 5449.81,3930.15 5449.81,3855.63 v1(5450.31,3855.13)
B0B1_N: C5.1 R20.1 U1.W2 | length 781.6
  Top Layer w6.25: R20.1@4625.18,4225.32 4639.65,4210.86 v1(4684.32,4210.86) 4726.02,4210.86 C5.1@4740.84,4225.67 ; v1(5249.46,4332.78) U1.W2@5265.21,4348.52
  Signal Layer 4 w6.25: v1(4684.32,4210.86) 4686.56,4213.11 4692.22,4213.11 4693.85,4214.73 5158.64,4214.73 5249.33,4305.42 5249.33,4332.64 v1(5249.46,4332.78)
B0B1_P: C17.1 R19.1 U1.V2 | length 828.3
  Top Layer w6: R19.1@4626.17,4291.41 4626.17,4290.86 4682.17,4234.86 v1(4684.32,4234.86) 4684.32,4236.54 4739.59,4291.81 C17.1@4739.86,4291.81
  Top Layer w6.25: v1(5249.46,4364.27) U1.V2@5265.21,4380.02
  Signal Layer 4 w4: 5233.4,4317.03 5233.4,4339.5 5247.21,4353.31 5247.21,4362.03 v1(5249.46,4364.27)
  Signal Layer 4 w6.25: v1(4684.32,4234.86) 4686.56,4232.61 4692.22,4232.61 4693.85,4230.98 5153.89,4230.98 5233.4,4310.5 5233.4,4317.03
B2B3_N: C6.1 R22.1 U1.W3 | length 889.1
  Top Layer w6.25: v1(5280.96,4332.78) U1.W3@5296.7,4348.52
  Signal Layer 4 w6.25: v1(4684.32,4141.47) 4687.49,4141.47 4691.8,4145.77 5145.68,4145.77 5280.96,4281.05 v1(5280.96,4332.78)
  Bottom Layer w6: R22.1@4625.09,4086.78 4626.07,4086.78 4641.77,4102.48 4641.77,4103.46 4677.49,4139.17 4682.02,4139.17 v1(4684.32,4141.47) 4734.11,4091.67 C6.1@4741.84,4091.67
B2B3_P: C18.1 R21.1 U1.V3 | length 861
  Top Layer w6.25: v1(5280.96,4364.27) U1.V3@5296.7,4380.02
  Signal Layer 4 w4: 5264.71,4327.53 5264.71,4348.02 v1(5280.96,4364.27)
  Signal Layer 4 w6.25: v1(4685.43,4166.32) 4688.61,4166.32 4692.91,4162.02 5134.93,4162.02 5264.71,4291.8 5264.71,4327.53
  Bottom Layer w6: v1(4685.43,4166.32) 4724.2,4166.32 C18.1@4738.35,4152.17
  Bottom Layer w6.25: R21.1@4625.09,4152.87 4638.54,4166.32 v1(4685.43,4166.32)
B4B5_N: C7.1 R24.1 U1.W4 | length 930
  Top Layer w6.25: R24.1@4626.18,4091.32 4639.67,4077.83 v1(4681.35,4077.83) 4728,4077.83 C7.1@4741.84,4091.67 ; v1(5312.45,4332.78) U1.W4@5328.2,4348.52
  Signal Layer 4 w6.25: v1(4681.35,4077.83) 4684.53,4077.83 4690.04,4083.34 5138.22,4083.34 5141.36,4086.47 5302.93,4248.05 5312.45,4257.57 v1(5312.45,4332.78)
B4B5_P: C19.1 R23.1 U1.V4 | length 969.8
  Top Layer w6: R23.1@4625.09,4152.87 4626.07,4152.87 4674.81,4104.13 4679.06,4104.13 v1(4681.35,4101.83) 4683.65,4104.13 4689.32,4104.13 4737.36,4152.17 C19.1@4738.35,4152.17
  Top Layer w6.25: v1(5312.45,4364.27) U1.V4@5328.2,4380.02
  Signal Layer 4 w4: 5296.2,4264.3 5296.2,4348.02 v1(5312.45,4364.27)
  Signal Layer 4 w6.25: v1@4679.78,4101.83 4682.03,4099.59 5131.49,4099.59 5134.63,4102.72 5296.2,4264.3
bMCU_GPIO0: J1.9 TP15.1 U24.2 | length 627
  Top Layer w6.25: TP15.1@4469,5683 4501.56,5650.44 4549.94,5650.44 U24.2@4552.72,5647.66
  Bottom Layer w6.25: J1.9@4266.7,5408.33 4209.67,5408.33 4193,5425 4193,5536.2 4339.8,5683 TP15.1@4469,5683
bMCU_GPIO1: J1.11 TP16.1 U24.3 | length 492.2
  Top Layer w6.25: TP16.1@4401,5648 4485,5648 4505.02,5627.98 U24.3@4552.72,5627.98
  Bottom Layer w6.25: J1.11@4266.7,5376.83 J1.11@4273.41,5383.55 ; J1.11@4301,5382 4319,5400 4319,5592 4370.29,5643.29 4396.29,5643.29 TP16.1@4401,5648
bMCU_GPIO2: J1.13 TP17.1 U24.5 | length 488.3
  Top Layer w6.25: TP17.1@4469,5613 4471.37,5610.63 4503.38,5610.63 4522.61,5591.39 4549.94,5591.39 U24.5@4552.72,5588.61
  Bottom Layer w6.25: J1.13@4266.7,5345.34 J1.13@4272.86,5351.5 ; J1.13@4300,5347 4334,5381 4334,5563 4384,5613 TP17.1@4469,5613
bMCU_GPIO3: J1.15 TP19.1 U24.6 | length 495.1
  Top Layer w6.25: TP19.1@4401,5579 4488,5579 4499,5568 4551.8,5568 U24.6@4552.72,5568.92
  Bottom Layer w6.25: J1.15@4266.7,5313.84 4273.41,5320.56 4303.56,5320.56 4350,5367 4350,5528 TP19.1@4401,5579
bMCU_GPIO4: J1.14 TP18.1 U24.8 | length 552.4
  Top Layer w6.25: v1(4147.01,5346.1) 4344.91,5544 TP18.1@4469,5544 4474.92,5544 4489.37,5529.55 U24.8@4552.72,5529.55
  Bottom Layer w6.25: J1.14@4088.32,5346.1 v1(4147.01,5346.1)
bMCU_GPIO5: J1.16 TP20.1 U24.9 | length 550.4
  Top Layer w6.25: v1(4146.01,5313.1) 4341.91,5509 TP20.1@4401,5509 U24.9@4552.7,5509 ; U24.9@4549.94,5512.65 U24.9@4552.72,5509.87
  Bottom Layer w6.25: J1.16@4087.32,5313.1 v1(4146.01,5313.1)
bMCU_GPIO6: J1.18 TP21.1 U24.11 | length 555.1
  Top Layer w6.25: v1(4148.01,5282.1) 4340.91,5475 TP21.1@4469,5475 TP21.1@4473.5,5470.5 ; TP21.1@4469,5470.5 TP21.1@4473.5,5470.5 ; TP21.1@4477.37,5466.63 TP21.1@4473.5,5470.5 ; U24.11@4552.72,5470.5 TP21.1@4473.5,5470.5
  Bottom Layer w6.25: J1.18@4089.32,5282.1 v1(4148.01,5282.1)
bMCU_GPIO7: J1.20 TP23.1 U24.12 | length 548
  Top Layer w6.25: v1(4147.01,5249.1) 4336.91,5439 TP23.1@4400,5439 4503,5439 4514.81,5450.81 U24.12@4552.72,5450.81
  Bottom Layer w6.25: J1.20@4088.32,5249.1 v1(4147.01,5249.1)
bMCU_GPIO8: J1.19 TP22.1 U24.13 | length 400.1
  Top Layer w6.25: TP22.1@4469,5406 4477.37,5414.37 4503.37,5414.37 4517.35,5428.35 4549.94,5428.35 U24.13@4551.6,5430
  Bottom Layer w6.25: J1.19@4266.7,5250.85 4273.41,5257.56 4306.56,5257.56 4317,5268 4317,5312 4364,5359 4364,5385 4385,5406 TP22.1@4469,5406
bMCU_GPIO9: J1.21 TP24.1 U24.14 | length 383.5
  Top Layer w6.25: TP24.1@4401,5370 4484,5370 4522.66,5408.66 4526.81,5408.66 4528,5409.85 U24.14@4528,5414 ; U24.14@4548.17,5410 U24.14@4551.17,5413
  Bottom Layer w6.25: J1.21@4266.7,5219.35 4273.41,5212.63 4286.85,5226.07 4307.07,5226.07 4333,5252 4333,5302 TP24.1@4401,5370
bMCU_GPIO10: J1.23 TP25.1 U24.16 | length 373.6
  Top Layer w6.25: TP25.1@4469,5337 4478,5337 4512,5371 U24.16@4529.33,5371
  Bottom Layer w6.25: J1.23@4266.7,5187.85 4273.41,5194.57 4305.57,5194.57 4349,5238 4349,5298 4388,5337 TP25.1@4469,5337
bMCU_GPIO11: J1.25 TP27.1 U24.17 | length 413.5
  Top Layer w6.25: TP27.1@4401,5301 4484,5301 4509,5326 4509,5335 4526.36,5352.36 U24.17@4552.72,5352.39 U24.17@4552.31,5351.97
  Bottom Layer w6.25: J1.25@4266.7,5156.36 4325.36,5156.36 4367,5198 4367,5267 TP27.1@4401,5301
bMCU_GPIO12: J1.24 TP26.1 U24.19 | length 528
  Top Layer w6.25: v1(4148.01,5189.1) 4225.91,5267 4471,5267 TP26.1@4480,5276 ; TP26.1@4470,5268 4478,5276 TP26.1@4480,5276 ; U24.19@4552.72,5313.02 4517.02,5313.02 TP26.1@4480,5276
  Bottom Layer w6.25: J1.24@4089.32,5189.1 v1(4148.01,5189.1)
bMCU_GPIO13: J1.26 TP28.1 U24.20 | length 549.8
  Top Layer w6.25: v1(4147.01,5156.1) 4221.91,5231 TP28.1@4401,5231 TP28.1@4403,5233 ; TP28.1@4387,5233 TP28.1@4403,5233 ; TP28.1@4404,5234 TP28.1@4403,5233 ; U24.20@4552.72,5293.33 4549.94,5290.55 4521.55,5290.55 4508,5277 4508,5258 4483,5233 TP28.1@4403,5233
  Bottom Layer w6.25: J1.26@4088.32,5156.1 v1(4147.01,5156.1)
bMCU_GPIO14: J1.28 TP29.1 U24.22 | length 505.2
  Top Layer w6.25: v1(4149.01,5125.1) 4217.91,5194 TP29.1@4471,5194 TP29.1@4479.57,5194 ; TP29.1@4483.36,5210.36 4524.18,5251.18 4549.94,5251.18 U24.22@4552.72,5253.96
  Bottom Layer w6.25: J1.28@4090.32,5125.1 v1(4149.01,5125.1)
bMCU_GPIO15: J1.30 TP31.1 U24.23 | length 514.2
  Top Layer w6.25: v1(4148.01,5092.1) 4215.91,5160 TP31.1@4403,5160 4484,5160 4508,5184 4508,5215 U24.23@4526,5233 ; U24.23@4552,5235 U24.23@4552.72,5234.28
  Bottom Layer w6.25: J1.30@4089.32,5092.1 v1(4148.01,5092.1)
bMCU_GPIO16: J1.29 TP30.1 U27.2 | length 309.6
  Top Layer w6.25: TP30.1@4472,5126 4506,5126 4522.6,5109.4 4551.93,5109.4 U27.2@4554.71,5106.61
  Bottom Layer w6.25: J1.29@4266.7,5093.37 4328.37,5093.37 4361,5126 TP30.1@4472,5126
bMCU_GPIO17: J1.31 TP32.1 U27.3 | length 301.8
  Top Layer w6.25: TP32.1@4403,5091 4513.28,5091 4517.35,5086.93 U27.3@4554.71,5086.93
  Bottom Layer w6.25: J1.31@4266.7,5061.87 4324.87,5061.87 4354,5091 TP32.1@4403,5091
bMCU_GPIO18: J1.33 TP33.1 U27.5 | length 303.5
  Top Layer w6.25: TP33.1@4472,5057 4505.29,5057 4514.96,5047.33 4554.48,5047.33 U27.5@4554.71,5047.56
  Bottom Layer w6.25: J1.33@4266.7,5030.37 4267.07,5030 4335,5030 4362,5057 TP33.1@4472,5057
bMCU_GPIO19: J1.35 TP35.1 U27.6 | length 302.3
  Top Layer w6.25: TP35.1@4404,5021 4508,5021 4513.99,5026.99 4553.71,5026.99 4554.59,5026.1 4555.56,5026.1 U27.6@4556.56,5025.1
  Bottom Layer w6.25: J1.35@4266.7,4998.88 4335.88,4998.88 4358,5021 TP35.1@4404,5021
bMCU_GPIO20: J1.34 TP34.1 U27.8 | length 485.9
  Top Layer w6.25: v1(4148.01,5031.1) 4192.9,5031.1 4239,4985 TP34.1@4474,4985 4509,4985 4512,4988 4554.21,4988 U27.8@4554.71,4988.5
  Bottom Layer w6.25: J1.34@4089.32,5031.1 v1(4148.01,5031.1)
bMCU_GPIO21: J1.36 TP36.1 U27.9 | length 493.3
  Top Layer w6.25: v1(4147.01,4998.1) 4194.9,4998.1 4242,4951 TP36.1@4404,4951 4495,4951 4512.82,4968.82 U27.9@4554.71,4968.82
  Bottom Layer w6.25: J1.36@4088.32,4998.1 v1(4147.01,4998.1)
bMCU_GPIO22: J1.38 TP37.1 U27.11 | length 490.3